# Altium PCB PCB1.PcbDoc (part 1 of 7)
Units mil, origin at the board's own origin, x right, y up, seen from the top; angles counter-clockwise.
Board outline 7650 x 4400 mil, 2 copper layers (Top Layer, Bottom Layer); 123 components, 190 nets, 788 pads, 165 vias.
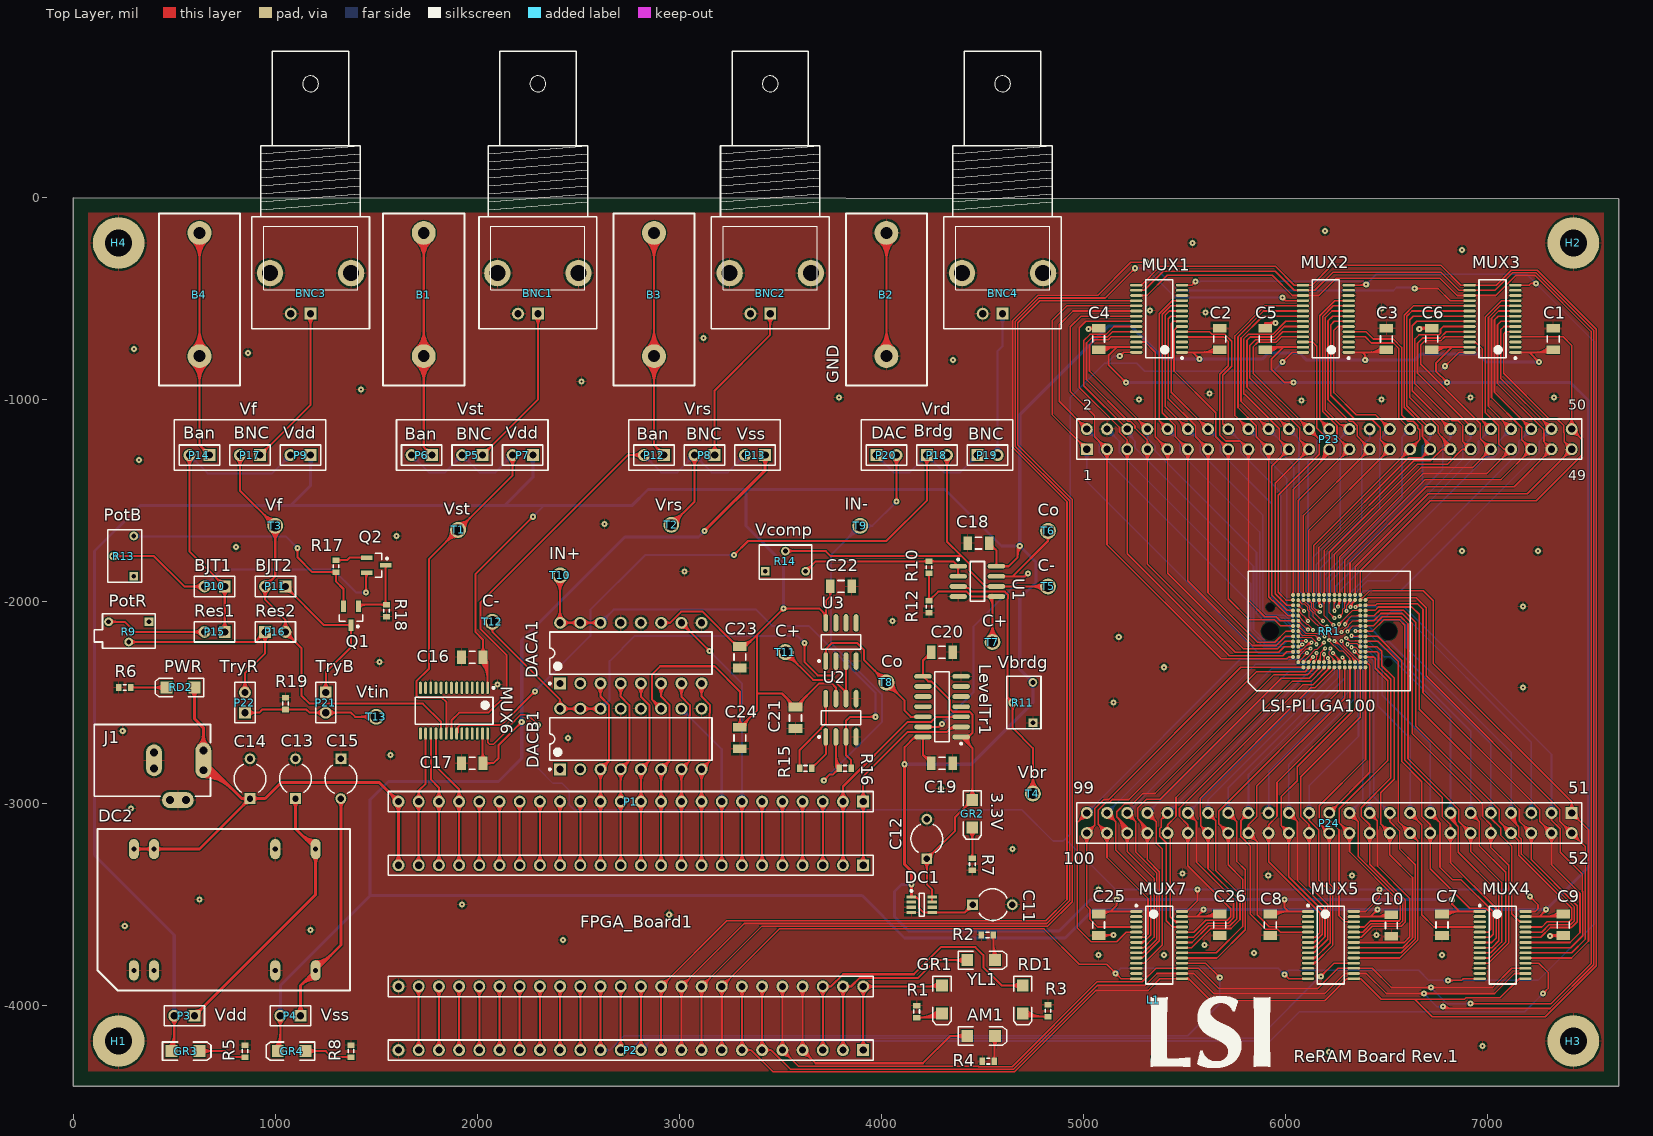
[diagram p0: Top Layer view]
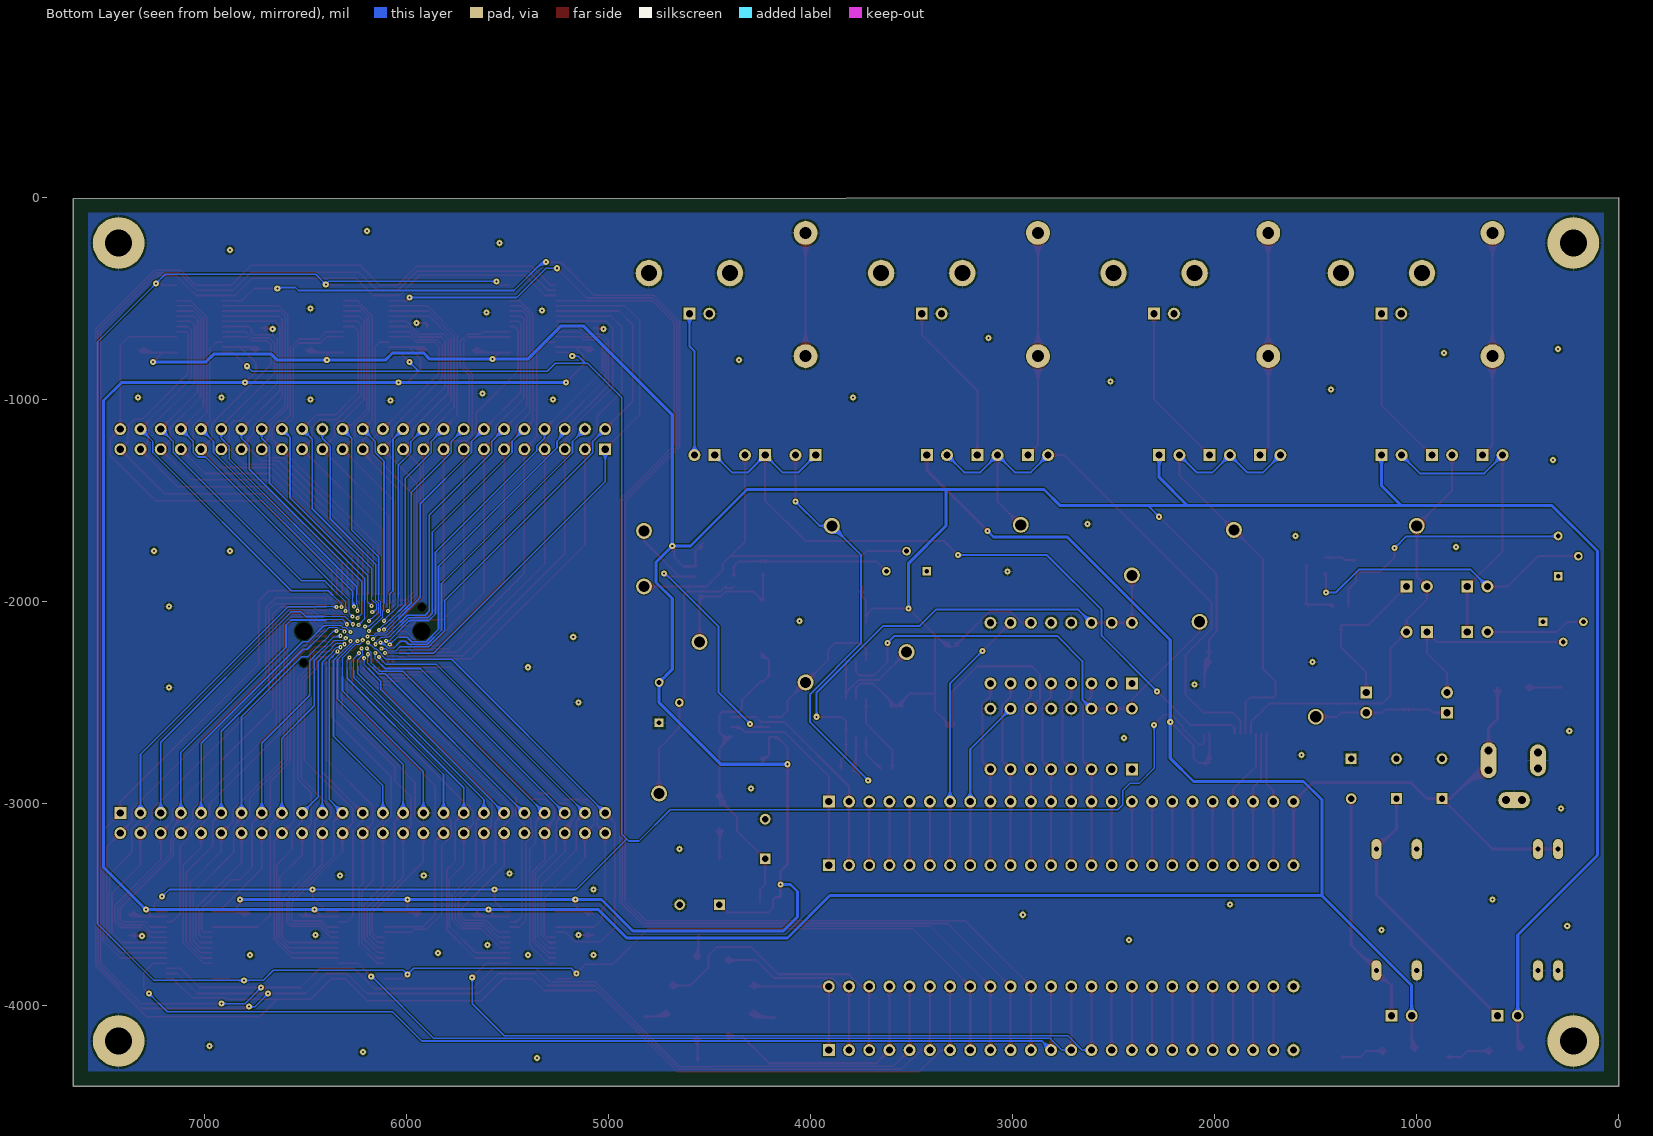
[diagram p1: Bottom Layer view, seen from below]

## Layer stack, top to bottom
Top Solder: solder mask 0.4, Solder Resist, Dk 3.5
Top Layer: signal copper 1.4
Dielectric 1: dielectric 12.6, FR-4, Dk 4.8
Bottom Layer: signal copper 1.4
Bottom Solder: solder mask 0.4, Solder Resist, Dk 3.5

## Board outline
0,0 0,-4400 7650,-4400 7650,-5

## Design rules (kind name [scope] priority, off if disabled: settings)
Clearance Clearance-xPP-xTP-xTT [All] p1: gap=5
ComponentClearance [All] p1: gap=9.84 collisioncheckmode=3 verticalgap=9.84 showdistances=FALSE
DiffPairsRouting [All] p1: maxlimit=9.84 minlimit=9.84 mostfreqgap=9.84 toplayer_minwidth=15 toplayer_maxwidth=15 toplayer_prefwidth=15 bottomlayer_minwidth=15 bottomlayer_maxwidth=15 bottomlayer_prefwidth=15 maxuncoupledlength=492.13
Height [All] p1: minheight=0 maxheight=984.25 prefheight=492.13
HoleSize HoleSize-PTH [All] p1: absolutevalues=TRUE maxlimit=200 minlimit=6 maxpercent=80.000 minpercent=20.000
HoleToHoleClearance [All] p1: gap=5.91 allowstackedmicrovias=TRUE
MinimumAnnularRing "Minimum IAR  >0.45mm" [((ObjectKind = 'Pad') OR (ObjectKind = 'Via')) And (Layer = 'MultiLayer') And (HoleDiameter > AsMM(0.45))] p1: minimumring=7 // minimum inner annular ring for pads > 0.45mm finished hole size
MinimumAnnularRing "Minimum IAR <=0.45mm" [((ObjectKind = 'Pad') OR (ObjectKind = 'Via')) And (Layer = 'MultiLayer') And (HoleDiameter <= AsMM(0.45))] p2: minimumring=7 // minimum inner annular ring for pads <= 0.45mm finished hole size
MinimumSolderMaskSliver [All] p1 off: minsoldermaskwidth=3.94
PlaneClearance PlaneClearance-IPI [All] p1: clearance=15.75
PlaneConnect [All] p1: planeconnectstyle=Relief reliefexpansion=15.75 reliefentries=4 reliefconductorwidth=7.87 reliefairgap=7.87
PolygonConnect PolygonConnect-xTW [All] p1: connectstyle=Relief reliefconductorwidth=7.87 reliefentries=4 polygonreliefangle="90 Angle" airgapwidth=10
RoutingCorners [All] p1: cornerstyle=45-Degree minsetback=98.43 maxsetback=98.43
RoutingVias "RoutingVias > 0.45mm" [(ObjectKind = 'Via') And (HoleDiameter > AsMM(0.45))] p1: holewidth=19.68 width=39.37 viastyle="Through Hole" minholewidth=17.72 minwidth=37.4 maxholewidth=35.43 maxwidth=55.12 // finishet hole size > 0.45mm
RoutingVias "RoutingVias <= 0.45mm" [(ObjectKind = 'Via') And (HoleDiameter <= AsMM(0.45))] p2: holewidth=6 width=20 viastyle="Through Hole" minholewidth=6 minwidth=20 maxholewidth=6 maxwidth=20 // finishet hole size <= 0.45mm
SilkToBoardRegionClearance [All] p1 off:
SilkToSilkClearance [All] p1: silktosilkclearance=7.87
SilkToSolderMaskClearance SilkscreenOverComponentPads [IsPad] p1 off: minsilkscreentomaskgap=7.87 clearancetoexposedcopper=TRUE
SolderMaskExpansion [All] p1: expansion=3.94
Width Width-xTW [All] p1: maxlimit=15 minlimit=5 preferedwidth=8 minimp=50.000000 maximp=50.000000 favimp=50.000000
17 further rules are at their usual default settings.

## Classes and differential pairs
net class S[0..5]: S0 S1 S2 S3 S4 S5
net class MODERW[0..1]: MODERW0 MODERW1
net class DAC[0..5]: DAC0 DAC1 DAC2 DAC3 DAC4 DAC5
net class CELL[0..95]: CELL0 CELL1 CELL2 CELL3 CELL4 CELL5 CELL6 CELL7 CELL8 CELL9 CELL10 CELL11 CELL12 CELL13 CELL14 CELL15 CELL16 CELL17 CELL18 CELL19 CELL20 CELL21 CELL22 CELL23 CELL24 CELL25 CELL26 CELL27 CELL28 CELL29 CELL30 CELL31 CELL32 CELL33 CELL34 CELL35 CELL36 CELL37 CELL38 CELL39 CELL40 CELL41 CELL42 CELL43 CELL44 CELL45 CELL46 CELL47 CELL48 CELL49 CELL50 CELL51 CELL52 CELL53 CELL54 CELL55 CELL56 CELL57 CELL58 CELL59 CELL60 CELL61 CELL62 CELL63 CELL64 CELL65 CELL66 CELL67 CELL68 CELL69 CELL70 CELL71 CELL72 CELL73 CELL74 CELL75 CELL76 CELL77 CELL78 CELL79 CELL80 CELL81 CELL82 CELL83 CELL84 CELL85 CELL86 CELL87 CELL88 CELL89 CELL90 CELL91 CELL92 CELL93 CELL94 CELL95
net class A[0..3]: A0 A1 A2 A3
component class RWcircuit_2: BNC4 C18 C19 C20 C21 C22 C23 C24 DACA1 DACB1 H1 H2 H3 H4 LevelTr1 P18 P19 P20 R10 R11 R12 R14 R15 R16 T4 T5 T6 T7 T8 T9 T10 T11 T12 U1 U2 U3
component class RWcircuit_1: B1 B2 B3 B4 BNC1 BNC2 BNC3 C16 C17 L1 MUX6 P5 P6 P7 P8 P9 P10 P11 P12 P13 P14 P15 P16 P17 P21 P22 Q1 Q2 R9 R13 R17 R18 R19 T1 T2 T3 T13
component class FPGA_board_and_power: AM1 C11 C12 C13 C14 C15 DC1 DC2 FPGA_Board1 GR1 GR2 GR3 GR4 J1 P1 P2 P3 P4 R1 R2 R3 R4 R5 R6 R7 R8 RD1 RD2 YL1
component class AddressingMuxes_2: C7 C8 C9 C10 C25 C26 MUX4 MUX5 MUX7
component class AddressingMuxes_1: C1 C2 C3 C4 C5 C6 MUX1 MUX2 MUX3
component class MemoryChip: P23 P24 RR1

## Components (designator, comment, footprint, x,y, rotation, side; value= is the part's Value field where it differs from the comment)
AM1 "LED2" 3.2X1.6X1.1 4493.9,-4150 r0 top
B1 "Banana_conn" Banana_conn_4mm 1735,-175 r0 top
B2 "Banana_conn" Banana_conn_4mm 4025,-175 r0 top
B3 "Banana_conn" Banana_conn_4mm 2875,-175 r0 top
B4 "Banana_conn" Banana_conn_4mm 625,-175 r0 top
BNC1 "BNC" "BNC_RA CON" 2300,-575 r270 top
BNC2 "BNC" "BNC_RA CON" 3450,-575 r270 top
BNC3 "BNC" "BNC_RA CON" 1175,-575 r270 top
BNC4 "BNC" "BNC_RA CON" 4600,-575 r270 top
C1 "Cap Semi" C1206 7325,-700 r270 top
C2 "Cap Semi" C1206 5675,-700 r90 top
C3 "Cap Semi" C1206 6500,-700 r90 top
C4 "Cap Semi" C1206 5075,-700 r90 top
C5 "Cap Semi" C1206 5900,-700 r90 top
C6 "Cap Semi" C1206 6725,-700 r270 top
C7 "Cap Semi" C1206 6775,-3600 r270 top
C8 "Cap Semi" C1206 5925,-3600 r90 top
C9 "Cap Semi" C1206 7375,-3600 r90 top
C10 "Cap Semi" C1206 6525,-3603.15 r90 top
C11 "Cap2" CAPR5-4X5 4550,-3500 r0 top
C12 "Cap2" CAPR5-4X5 4225,-3175 r90 top
C13 "Cap2" CAPR5-4X5 1100,-2876.57 r90 top
C14 "Cap2" CAPR5-4X5 875,-2876.57 r90 top
C15 "Cap2" CAPR5-4X5 1325,-2876.57 r270 top
C16 "Cap Semi" C1206 1975,-2275 r180 top
C17 "Cap Semi" C1206 1975,-2800 r0 top
C18 "Cap Semi" C1206 4480.43,-1710 r0 top
C19 "Cap Semi" C1206 4300,-2800 r180 top
C20 "Cap Semi" C1206 4300,-2250 r180 top
C21 "Cap Semi" C1206 3575,-2575 r270 top
C22 "Cap Semi" C1206 3800,-1925 r180 top
C23 "Cap Semi" C1206 3300,-2275 r270 top
C24 "Cap Semi" C1206 3300,-2675 r90 top
C25 "Cap Semi" C1206 5075,-3600 r90 top
C26 "Cap Semi" C1206 5675,-3600 r90 top
DACA1 "AD558JNZ" N-16 2760,-2255 r90 top
DACB1 "AD558JNZ" N-16 2760,-2680 r90 top
DC1 "LT3007ETS8-3.3#TRMPBF" LT-TS8-8-TSOT-23_V 4200,-3500 r0 top
DC2 "TEN_3-1221" TEN_3-1221 750,-3525 r90 top
FPGA_Board1 "Cmod_S6" Cmod_S6_double_conn 2760,-3605 r270 top
GR1 "LED2" 3.2X1.6X1.1 4300,-3968.9 r270 top
GR2 "" 3.2X1.6X1.1 4450,-3050 r270 top
GR3 "" 3.2X1.6X1.1 556.1,-4225 r0 top
GR4 "" 3.2X1.6X1.1 1081.1,-4225 r180 top
H1 "M3_hole" M3_hole 225,-4175 r0 top
H2 "M3_hole" M3_hole 7425,-225 r0 top
H3 "M3_hole" M3_hole 7425,-4175 r0 top
H4 "M3_hole" M3_hole 225,-225 r0 top
J1 "PWR2.5" KLD-0202 104.72,-2785.63 r0 top
L1 "LSI_logo" LSI_logo 5345,-3970 r0 top
LevelTr1 "TXS0104E" SOIC127P600X175-14N 4300.51,-2520 r180 top
MUX1 "ADG1606" TSOP65P640X120-28N 5375,-600 r180 top
MUX2 "ADG1606" TSOP65P640X120-28N 6200,-600 r180 top
MUX3 "ADG1606" TSOP65P640X120-28N 7025,-600 r180 top
MUX4 "ADG1606" TSOP65P640X120-28N 7075,-3700 r0 top
MUX5 "ADG1606" TSOP65P640X120-28N 6225,-3700 r0 top
MUX6 "ADG1606" TSOP65P640X120-28N 1885,-2540 r270 top
MUX7 "ADG1606" TSOP65P640X120-28N 5375,-3700 r0 top
P1 "Header 24" HDR1X24 3910,-2990 r180 top
P2 "Header 24" HDR1X24 3910,-4220 r180 top
P3 "Header 2" HDR1X2 600,-4050 r180 top
P4 "Header 2" HDR1X2 1125,-4050 r180 top
P5 "Header 2" HDR1X2 2025,-1275 r180 top
P6 "Header 2" HDR1X2 1775,-1275 r180 top
P7 "Header 2" HDR1X2 2275,-1275 r180 top
P8 "Header 2" HDR1X2 3175,-1275 r180 top
P9 "Header 2" HDR1X2 1175,-1275 r180 top
P10 "Header 2" HDR1X2 750,-1925 r180 top
P11 "Header 2" HDR1X2 1050,-1925 r180 top
P12 "Header 2" HDR1X2 2925,-1275 r180 top
P13 "Header 2" HDR1X2 3425,-1275 r180 top
P14 "Header 2" HDR1X2 675,-1275 r180 top
P15 "Header 2" HDR1X2 750,-2150 r180 top
P16 "Header 2" HDR1X2 950,-2150 r0 top
P17 "Header 2" HDR1X2 925,-1275 r180 top
P18 "Header 2" HDR1X2 4225,-1275 r0 top
P19 "Header 2" HDR1X2 4475,-1275 r0 top
P20 "Header 2" HDR1X2 3975,-1275 r0 top
P21 "Header 2" HDR1X2 1250,-2450 r270 top
P22 "Header 2" HDR1X2 850,-2550 r90 top
P23 "Header 25X2" HDR2X25 5017,-1246 r0 top
P24 "Header 25X2" HDR2X25 7417,-3046 r180 top
Q1 "BSS84_MOSFET-P" BSS84_MOSFET-P 1375,-2070 r270 top
Q2 "PNP" MMBT5087_PNP 1500,-1820 r0 top
R1 "Res3" J1-0603 4175,-4029.53 r270 top
R2 "Res3" J1-0603 4525,-3650 r0 top
R3 "Res3" J1-0603 4825,-4025 r270 top
R4 "Res3" J1-0603 4529.53,-4275 r0 top
R5 "Res3" J1-0603 850,-4225 r90 top
R6 "Res3" J1-0603 254.53,-2425 r180 top
R7 "Res3" J1-0603 4450,-3300 r270 top
R8 "Res3" J1-0603 1375,-4225 r90 top
R9 "Trim" Trim_Bourns_3266X 275,-2100 r180 top
R10 "Res3" J1-0603 4235,-1830 r90 top
R11 "Trim" Trim_Bourns_3266W 4750,-2500 r90 top
R12 "Res3" J1-0603 4235,-2025.47 r90 top
R13 "Trim" Trim_Bourns_3266W 300,-1775 r90 top
R14 "Trim" Trim_Bourns_3266W 3525,-1850 r0 top
R15 "Res3" J1-0603 3625,-2825 r180 top
R16 "Res3" J1-0603 3820.47,-2825 r180 top
R17 "Res3" J1-0603 1300,-1824.53 r90 top
R18 "Res3" J1-0603 1550,-2045 r270 top
R19 "Res3" J1-0603 1050,-2504.53 r270 top
RD1 "LED2" 3.2X1.6X1.1 4700,-3968.9 r270 top
RD2 "" 3.2X1.6X1.1 531.1,-2425 r180 top
RR1 "ReRAM chip" LSI-PLLGA100 6217,-2146 r90 top
T1 "Test_point" Test_point_1.32mm 1905,-1645 r180 top
T2 "Test_point" Test_point_1.32mm 2960,-1620 r180 top
T3 "Test_point" Test_point_1.32mm 1000,-1625 r180 top
T4 "Test_point" Test_point_1.32mm 4750,-2950 r180 top
T5 "Test_point" Test_point_1.32mm 4825,-1925 r180 top
T6 "Test_point" Test_point_1.32mm 4825,-1650 r180 top
T7 "Test_point" Test_point_1.32mm 4550,-2200 r180 top
T8 "Test_point" Test_point_1.32mm 4025,-2400 r180 top
T9 "Test_point" Test_point_1.32mm 3895,-1625 r180 top
T10 "Test_point" Test_point_1.32mm 2410,-1870 r180 top
T11 "Test_point" Test_point_1.32mm 3525,-2250 r180 top
T12 "Test_point" Test_point_1.32mm 2075,-2100 r180 top
T13 "Test_point" Test_point_1.32mm 1500,-2570 r0 top
U1 "AD8616ARZ" ADI-R-8_N 4475,-1900 r0 top
U2 "LT1167AIS8#PBF" LT-S8-8_N 3800,-2575 r90 top
U3 "AD8616ARZ" ADI-R-8_N 3800,-2200 r90 top
YL1 "LED2" 3.2X1.6X1.1 4493.9,-3775 r0 top

## Footprints (in the part's own frame and the unit in brackets; to place one, negate y for a bottom-side part, rotate by r counter-clockwise, add the part's x,y. Pads: shape width x height; smd on the part's side, far side on the other; paste and mask are expansions set on the pad)
3.2X1.6X1.1 [mm] "SMT LED; 2 Flat Leads"
  rect 1.5x1.5 smd: 1(-1.75,0) 2(1.75,0)
  silkscreen extent -2.9,-1.15 3.2,1.15
ADI-R-8_N [mm] "SOIC, 8-Leads, Body 4.9x3.9mm, Pitch 1.27mm, IPC Medium Density"
  oval 2.2x0.6 smd: 1(-2.4,1.905) 2(-2.4,0.635) 3(-2.4,-0.635) 4(-2.4,-1.905) 5(2.4,-1.905) 6(2.4,-0.635) 7(2.4,0.635) 8(2.4,1.905)
  silkscreen extent -2.52,-2.5 0.9,2.88, body extent -2,-2.5 2,2.5, height 1.75
Banana_conn_4mm [mm]
  round 3 hole 1.5: 1(0,-15.5) 1(0,0)
  silkscreen extent -5.1,-19.18 5.1,2.41
"BNC_RA CON" [mm] "Connector; BNC Elbow"
  rect 1.5x1.5 hole 0.9: 1(0,0)
  round 3.3 hole 2: 2(-5.1,5.1) 2(-5.1,-5.1)
  round 1.5 hole 0.9: 2(0,-2.5)
  silkscreen extent -33,-7.4 1.9,7.4
BSS84_MOSFET-P [mm]
  rect 1.45x0.6 smd: 1(-1.175,0.95) 2(-1.175,-0.95) 3(1.175,0)
  silkscreen extent -0.1,-1.5 1.47,1.5, body extent -0.7,-1.5 0.7,1.5, height 1.1
C1206 [mm] "Chip Capacitor, Body 3.2x1.6mm, IPC High Density"
  rect 1.1x1.7 smd: 1(-1.35,0) 2(1.35,0)
  silkscreen extent -0.4,-0.75 0.4,0.75, body extent -1.7,-0.9 1.7,0.9, height 1.3
CAPR5-4X5 [mm] "Capacitor; 2 Leads"
  rect 1.35x1.35 hole 0.8: 1(-2.5,0)
  round 1.35 hole 0.8: 2(2.5,0)
  silkscreen extent -1.69,-2 1.82,2
Cmod_S6_double_conn [mm]
  rect 1.5x1.5 hole 0.9: 1(-7.62,29.21)
  round 1.5 hole 0.9: 2(-7.62,26.67) 3(-7.62,24.13) 4(-7.62,21.59) 5(-7.62,19.05) 6(-7.62,16.51) 7(-7.62,13.97) 8(-7.62,11.43) 9(-7.62,8.89) 10(-7.62,6.35) 11(-7.62,3.81) 12(-7.62,1.27) 13(-7.62,-1.27) 14(-7.62,-3.81) 15(-7.62,-6.35) 16(-7.62,-8.89) 17(-7.62,-11.43) 18(-7.62,-13.97) 19(-7.62,-16.51) 20(-7.62,-19.05) 21(-7.62,-21.59) 22(-7.62,-24.13) 23(-7.62,-26.67) 24(-7.62,-29.21) 25(7.62,-29.21) 26(7.62,-26.67) 27(7.62,-24.13) 28(7.62,-21.59) 29(7.62,-19.05) 30(7.62,-16.51) 31(7.62,-13.97) 32(7.62,-11.43) 33(7.62,-8.89) 34(7.62,-6.35) 35(7.62,-3.81) 36(7.62,-1.27) 37(7.62,1.27) 38(7.62,3.81) 39(7.62,6.35) 40(7.62,8.89) 41(7.62,11.43) 42(7.62,13.97) 43(7.62,16.51) 44(7.62,19.05) 45(7.62,21.59) 46(7.62,24.13) 47(7.62,26.67) 48(7.62,29.21)
  silkscreen extent -8.89,-30.48 8.89,30.48
HDR1X2 [mm] "Connector; Header; 2 Position"
  rect 1.5x1.5 hole 0.9: 1(0,0)
  round 1.5 hole 0.9: 2(2.54,0)
  silkscreen extent -1.27,-1.27 3.81,1.27
HDR1X24 [mm] "Connector; Header; 24 Position"
  rect 1.5x1.5 hole 0.9: 1(0,0)
  round 1.5 hole 0.9: 2(2.54,0) 3(5.08,0) 4(7.62,0) 5(10.16,0) 6(12.7,0) 7(15.24,0) 8(17.78,0) 9(20.32,0) 10(22.86,0) 11(25.4,0) 12(27.94,0) 13(30.48,0) 14(33.02,0) 15(35.56,0) 16(38.1,0) 17(40.64,0) 18(43.18,0) 19(45.72,0) 20(48.26,0) 21(50.8,0) 22(53.34,0) 23(55.88,0) 24(58.42,0)
  silkscreen extent -1.27,-1.27 59.69,1.27
HDR2X25 [mm] "Connector; Header; 25x2 Position"
  rect 1.5x1.5 hole 0.9: 1(0,0)
  round 1.5 hole 0.9: 2(0,2.54) 3(2.54,0) 4(2.54,2.54) 5(5.08,0) 6(5.08,2.54) 7(7.62,0) 8(7.62,2.54) 9(10.16,0) 10(10.16,2.54) 11(12.7,0) 12(12.7,2.54) 13(15.24,0) 14(15.24,2.54) 15(17.78,0) 16(17.78,2.54) 17(20.32,0) 18(20.32,2.54) 19(22.86,0) 20(22.86,2.54) 21(25.4,0) 22(25.4,2.54) 23(27.94,0) 24(27.94,2.54) 25(30.48,0) 26(30.48,2.54) 27(33.02,0) 28(33.02,2.54) 29(35.56,0) 30(35.56,2.54) 31(38.1,0) 32(38.1,2.54) 33(40.64,0) 34(40.64,2.54) 35(43.18,0) 36(43.18,2.54) 37(45.72,0) 38(45.72,2.54) 39(48.26,0) 40(48.26,2.54) 41(50.8,0) 42(50.8,2.54) 43(53.34,0) 44(53.34,2.54) 45(55.88,0) 46(55.88,2.54) 47(58.42,0) 48(58.42,2.54) 49(60.96,0) 50(60.96,2.54)
  silkscreen extent -1.27,-1.27 62.23,3.81
J1-0603 [mm] "Chip Resistor, Body 1.6x0.8mm, IPC High Density"
  rect 0.7x0.9 smd: 1(-0.75,0) 2(0.75,0)
  silkscreen extent -0.2,-0.35 0.2,0.35, body extent -0.85,-0.48 0.85,0.48, height 0.9
KLD-0202 [mm] "DC Power Jack, 2.5mm, KLD Series, PCB Mount"
  oval 2x4.5 all layers, no hole: 1(13.7,0)
  round 1.5 hole 1: 1A(13.7,-1.25) 1B(13.7,1.25) 2A(7.5,-1) 2B(7.5,1) 3A(9.5,-5) 3B(11.5,-5)
  oval 2x4 all layers, no hole: 2(7.5,0)
  oval 4x2 all layers, no hole: 3(10.5,-5)
  silkscreen extent 0,-4.5 14.6,4.5
LSI-PLLGA100 [mm]
  round 0.5 smd: 1(-3.9,3.9) 2(-3.25,3.9) 3(-3.25,4.55) 4(-2.6,3.9) 5(-2.6,4.55) 6(-1.95,3.9) 7(-1.95,4.55) 8(-1.3,3.9) 9(-1.3,4.55) 10(-0.65,3.9) 11(-0.65,4.55) 12(0,3.9) 13(0,4.55) 14(0.65,3.9) 15(0.65,4.55) 16(1.3,3.9) 17(1.3,4.55) 18(1.95,3.9) 19(1.95,4.55) 20(2.6,3.9) 21(2.6,4.55) 22(3.25,3.9) 23(3.25,4.55) 24(3.9,4.55) 25(4.55,4.55) 26(3.9,3.9) 27(4.55,3.9) 28(3.9,3.25) 29(4.55,3.25) 30(3.9,2.6) 31(4.55,2.6) 32(3.9,1.95) 33(4.55,1.95) 34(3.9,1.3) 35(4.55,1.3) 36(3.9,0.65) 37(4.55,0.65) 38(3.9,0) 39(4.55,0) 40(3.9,-0.65) 41(4.55,-0.65) 42(3.9,-1.3) 43(4.55,-1.3) 44(3.9,-1.95) 45(4.55,-1.95) 46(3.9,-2.6) 47(4.55,-2.6) 48(3.9,-3.25) 49(4.55,-3.25) 50(4.55,-3.9) 51(3.9,-3.9) 52(3.9,-4.55) 53(3.25,-3.9) 54(3.25,-4.55) 55(2.6,-3.9) 56(2.6,-4.55) 57(1.95,-3.9) 58(1.95,-4.55) 59(1.3,-3.9) 60(1.3,-4.55) 61(0.65,-3.9) 62(0.65,-4.55) 63(0,-3.9) 64(0,-4.55) 65(-0.65,-3.9) 66(-0.65,-4.55) 67(-1.3,-3.9) 68(-1.3,-4.55) 69(-1.95,-3.9) 70(-1.95,-4.55) 71(-2.6,-3.9) 72(-2.6,-4.55) 73(-3.25,-3.9) 74(-3.25,-4.55) 75(-3.9,-4.55) 76(-4.55,-4.55) 77(-3.9,-3.9) 78(-4.55,-3.9) 79(-3.9,-3.25) 80(-4.55,-3.25) 81(-3.9,-2.6) 82(-4.55,-2.6) 83(-3.9,-1.95) 84(-4.55,-1.95) 85(-3.9,-1.3) 86(-4.55,-1.3) 87(-3.9,-0.65) 88(-4.55,-0.65) 89(-3.9,0) 90(-4.55,0) 91(-3.9,0.65) 92(-4.55,0.65) 93(-3.9,1.3) 94(-4.55,1.3) 95(-3.9,1.95) 96(-4.55,1.95) 97(-3.9,2.6) 98(-4.55,2.6) 99(-3.9,3.25) 100(-4.55,3.25)
  round 0 hole 1.05 unplated paste+0 mask+0: ""(-4,-7.425) ""(3,7.425)
  round 0 hole 2.2 unplated paste+0 mask+0: ""(0,7.425) ""(0,-7.425)
  silkscreen extent -7.5,-10.16 7.5,10.16
LSI_logo [mil]
  silkscreen extent -12,-336 581,17
LT-S8-8_N [mm] "SOIC, 8-Leads, Body 4.9x3.9mm, Pitch 1.27mm, IPC Medium Density"
  oval 2.2x0.6 smd: 1(-2.4,1.905) 2(-2.4,0.635) 3(-2.4,-0.635) 4(-2.4,-1.905) 5(2.4,-1.905) 6(2.4,-0.635) 7(2.4,0.635) 8(2.4,1.905)
  silkscreen extent -2.52,-2.5 0.9,2.88, body extent -2,-2.5 2,2.5, height 1.76
LT-TS8-8-TSOT-23_V [mm] "SOT23, 8-Leads, Body 2.90x1.63mm, Pitch 0.65mm, Recommended"
  rect 1.22x0.4 smd: 1(-1.31,0.975) 2(-1.31,0.325) 3(-1.31,-0.325) 4(-1.31,-0.975) 5(1.31,-0.975) 6(1.31,-0.325) 7(1.31,0.325) 8(1.31,0.975)
  silkscreen extent -1.43,-1.45 0.3,1.85, body extent -0.87,-1.45 0.88,1.45, height 1
M3_hole [mm]
  round 6.5 hole 3.4 mask+0.5: 1(0,0)
MMBT5087_PNP [mm]
  rect 1.45x0.6 smd: 1(1.175,0) 2(-1.175,0.95) 3(-1.175,-0.95)
  silkscreen extent -0.1,-1.5 1.48,1.5, body extent -0.7,-1.5 0.7,1.5, height 1.1
N-16 [mm] "DIP, 16-Leads, Row Spacing 7.62mm, Pitch 2.54mm, Body 20.1x6.6mm"
  rect 1.5x1.5 hole 0.9: 1(-3.81,8.89)
  round 1.5 hole 0.9: 2(-3.81,6.35) 3(-3.81,3.81) 4(-3.81,1.27) 5(-3.81,-1.27) 6(-3.81,-3.81) 7(-3.81,-6.35) 8(-3.81,-8.89) 9(3.81,-8.89) 10(3.81,-6.35) 11(3.81,-3.81) 12(3.81,-1.27) 13(3.81,1.27) 14(3.81,3.81) 15(3.81,6.35) 16(3.81,8.89)
  silkscreen extent -3.93,-10.2 2.65,10.31, body extent -3.55,-10.15 3.55,10.15, height 5.33
SOIC127P600X175-14N [mm] "SOIC, 14-Leads, Body 8.65x3.90mm, Pitch 1.27mm, IPC Medium Density"
  oval 2.2x0.6 smd: 1(-2.4,3.81) 2(-2.4,2.54) 3(-2.4,1.27) 4(-2.4,0) 5(-2.4,-1.27) 6(-2.4,-2.54) 7(-2.4,-3.81) 8(2.4,-3.81) 9(2.4,-2.54) 10(2.4,-1.27) 11(2.4,0) 12(2.4,1.27) 13(2.4,2.54) 14(2.4,3.81)
  silkscreen extent -2.53,-4.4 0.9,4.78, body extent -2,-4.4 2,4.4, height 1.75
TEN_3-1221 [mil]
  oval 100x50 hole 25: 2(-300,450) 3(-300,350) 9(-300,-250) 11(-300,-450) 14(300,-450) 16(300,-250) 22(300,350) 23(300,450)
  silkscreen extent -400,-620 400,630
Test_point_1.32mm [mm]
  round 2 hole 1.4: 1(0,0)
Trim_Bourns_3266W [mm]
  rect 1.1x1.1 hole 0.6: 1(-2.54,0)
  round 1.1 hole 0.6: 2(0,2.54) 3(2.54,0)
  silkscreen extent -3.3,-1.02 3.3,3.3
Trim_Bourns_3266X [mm]
  rect 1.1x1.1 hole 0.6: 1(-2.54,0)
  round 1.1 hole 0.6: 2(0,2.54) 3(2.54,0)
  silkscreen extent -3.3,-1.02 4.32,3.3
TSOP65P640X120-28N [mm] "TSOP, 28-Leads, Body 9.70x4.40mm, Pitch 0.65mm, IPC Medium Density"
  oval 1.55x0.35 smd: 1(-2.875,4.225) 2(-2.875,3.575) 3(-2.875,2.925) 4(-2.875,2.275) 5(-2.875,1.625) 6(-2.875,0.975) 7(-2.875,0.325) 8(-2.875,-0.325) 9(-2.875,-0.975) 10(-2.875,-1.625) 11(-2.875,-2.275) 12(-2.875,-2.925) 13(-2.875,-3.575) 14(-2.875,-4.225) 15(2.875,-4.225) 16(2.875,-3.575) 17(2.875,-2.925) 18(2.875,-2.275) 19(2.875,-1.625) 20(2.875,-0.975) 21(2.875,-0.325) 22(2.875,0.325) 23(2.875,0.975) 24(2.875,1.625) 25(2.875,2.275) 26(2.875,2.925) 27(2.875,3.575) 28(2.875,4.225)
  silkscreen extent -3,-4.9 1.7,5.07, body extent -2.25,-4.9 2.25,4.9, height 1.2

## Part data
AM1 GR1 RD1 YL1: "Typical RED, GREEN, YELLOW, AMBER GaAs LED"
B1 B2 B3 B4: library part Banana_conn_4mm, "Multicomp banana connector 4mm pcb through hole"
BNC1 BNC2 BNC3 BNC4: "BNC Elbow Connector"
C1 C2 C3 C4 C5 C6 C7 C8 C9 C10 C16 C17 C18 C19 C20 C21 C22 C23 C24 C25 C26: "Capacitor (Semiconductor SIM Model)"
C11 C12 C13 C14 C15: "Capacitor"
DACA1 DACB1: "Single 8-Bit Low Cost Complete uP-Compatible DACPORT, 0 to +70 degC, N-16, Pb-Free, Tube"
DC1: "3 uA IQ, 20 mA, Low Dropout Fault Tolerant Linear Regulator, 2 to 45 V Vin, 3.3 V Vout, 8-pin SOT23 (TS8-8), -40 to 125 degC, Pb-Free, Mini Tape and Reel"
DC2: "Tracopower TEN 3-1221"
FPGA_Board1: "Digilent Cmod S6 Board"
GR2 GR3 GR4 RD2: library part LED2, "Typical RED, GREEN, YELLOW, AMBER GaAs LED"
H1 H2 H3 H4: "M3 hole"
J1: "Low Voltage Power Supply Connector"
L1: "LSI logo"
LevelTr1: "Texas Instruments TXS0104E"
MUX1 MUX2 MUX3 MUX4 MUX5 MUX6 MUX7: "Analog Devices ADG1606"
P1 P2: "Header, 24-Pin"
P3 P4 P5 P6 P7 P8 P9 P10 P11 P12 P13 P14 P15 P16 P17 P18 P19 P20 P21 P22: "Header, 2-Pin"
P23 P24: "Header, 25-Pin, Dual row"
Q1: "BSS84 P-Channel MOSFET"
Q2: library part MMBT5087_PNP, "MMBT5087 PNP Bipolar Transistor"
R1 R2 R3 R4 R5 R6 R7 R8 R10 R12 R15 R16 R17 R18 R19: "Resistor"
R9: library part Trim_Bourns_3266X, "Trimmer Bourns 3266X"
R11 R13 R14: library part Trim_Bourns_3266W, "Trimmer Bourns 3266W"
RR1: library part ReRAM_LSI-PLLGA100, "ReRAM chip on LSI-PLLGA100 custom socket"
T1 T2 T3 T4 T5 T6 T7 T8 T9 T10 T11 T12 T13: library part Test_point_1.32mm, "Test point 1.32mm"
U1 U3: "Double Channel Wide Bandwidth Operational Amplifier, 24 MHz BW, 12 V/us SR, Industrial, 8-pin SOIC (R-8), Tube"
U2: "Single Channel, Precision Operational Amplifier, Low Bias Current IA, 1 MHz Typical GBW, 1.2 V/us Typical SR, 4.6 to 40 V, 8-Pin SOIC (S8-8), Industrial, Pb-Free"

## Via types
v1: diameter 30, hole 10, Top Layer to Bottom Layer, 118 vias
v2: diameter 20, hole 6, Top Layer to Bottom Layer, 47 vias

## Nets (pads, with @x,y where several pads share a name; then routed paths per layer and width w, separated by ;. In a path a pad name is that pad's centre, name@x,y a point inside that pad or via, vN(x,y) a via of type N, cw(c..) or ccw(c..) an arc to the next point about the centre after c; other vN are vias at no path point)
3.3V: C12.1 C20.2 DC1.7 DC1.8 GR2.1 LevelTr1.1 LevelTr1.8 | length 2448.4
  Top Layer w10: 4206.03,-2290.83 cw(c4237.57,-2322.37) C20.2@4244.33,-2278.27 ; C12.1@4209.74,-3288.68 cw(c4172.91,-3325.51) 4225,-3325.51 cw(c4277.09,-3325.51) C12.1@4240.26,-3288.68 ; C12.1@4216.82,-3281.61 cw(c4197.06,-3301.37) 4225,-3301.37 cw(c4252.94,-3301.37) C12.1@4233.18,-3281.61 ; 4219.99,-2276.86 cw(c4241.28,-2298.15) C20.2@4245.84,-2268.39 ; C12.1@4225,-3261.85 ccw(c4225,-3233.91) 4244.76,-3253.67 ccw(c4264.52,-3273.43) C12.1@4236.57,-3273.43 ; C12.1@4225,-3251.85 ccw(c4225,-3199.76) 4261.83,-3236.59 ccw(c4298.66,-3273.43) C12.1@4246.57,-3273.43 ; C20.2@4226.77,-2270.08 ccw(c4218.51,-2261.81) C20.2@4230.2,-2261.81 ; C20.2@4246.85,-2250 4206.02,-2290.83 LevelTr1.8@4206.02,-2370 4231.21,-2395.19 4247.8,-2395.19 4338.69,-2486.09 4338.69,-2530.28 4353.6,-2545.19 4436.77,-2545.19 4451.31,-2559.72 4451.31,-2648.69 4430,-2670 LevelTr1.1@4395,-2670 4450,-2725 ; DC1.7@4251.57,-3487.2 DC1.8@4251.57,-3461.61 4251.57,-3426.57 4225,-3400 C12.1@4225,-3273.43 4365,-3133.43 4365,-3066.1 GR2.1@4450,-2981.1 4450,-2725 ; LevelTr1.1@4393.84,-2664.06 ccw(c4401.56,-2665.47) LevelTr1.1@4396.01,-2671.01 ; LevelTr1.1@4403.68,-2665.85 ccw(c4424.4,-2669.62) 4409.51,-2684.51 ; LevelTr1.1@4413.52,-2667.64 ccw(c4447.24,-2673.77) 4423.01,-2698.01 ; LevelTr1.1@4423.36,-2669.43 ccw(c4470.08,-2677.92) 4436.5,-2711.5 ; GR2.1@4425.47,-2981.1 cw(c4366.26,-2981.1) 4408.13,-3022.97 cw(c4450,-3064.84) GR2.1@4450,-3005.63 ; LevelTr1.1@4426.5,-2663.19 ccw(c4426.5,-2638.29) 4444.1,-2655.9 ; GR2.1@4432.66,-2963.76 ccw(c4390.79,-2921.89) 4450,-2921.89 ccw(c4509.21,-2921.89) GR2.1@4467.34,-2963.76 ; LevelTr1.1@4433.2,-2671.22 ccw(c4492.92,-2682.07) 4450,-2725 ; GR2.1@4435.47,-2981.1 cw(c4400.4,-2981.1) 4425.2,-3005.9 cw(c4450,-3030.7) GR2.1@4450,-2995.63 ; GR2.1@4439.73,-2970.83 ccw(c4414.93,-2946.03) 4450,-2946.03 ccw(c4485.07,-2946.03) GR2.1@4460.27,-2970.83 ; 4206.02,-2353.56 ccw(c4222.47,-2353.56) 4210.84,-2365.18 cw(c4222.47,-2353.56) 4206.02,-2353.56 ; 4206.02,-2353.56 cw(c4189.58,-2353.56) 4201.21,-2365.18 ccw(c4189.58,-2353.56) 4206.02,-2353.56
5V: C13.1 DC2.14 P3.1 | length 1719.9
  Top Layer w15: P3.1@600,-4050 1200,-3450 DC2.14@1200,-3225 1100,-3125 C13.1@1100,-2975 ; P3.1@600,-4027.97 ccw(c600,-3974.79) 637.6,-4012.4 ccw(c675.21,-4050) P3.1@622.03,-4050 ; C13.1@1086.51,-2988.49 cw(c1053.95,-3021.05) 1100,-3021.05 cw(c1146.05,-3021.05) C13.1@1113.49,-2988.49 ; 1127.45,-3152.45 ccw(c1200,-3079.9) DC2.14@1200,-3182.5 ; 1153.05,-3178.05 ccw(c1200,-3131.11) DC2.14@1200,-3197.5 ; DC2.14@1187.63,-3262.37 cw(c1157.75,-3292.25) 1200,-3292.25 cw(c1242.25,-3292.25) DC2.14@1212.37,-3262.37
-5V: C15.2 DC2.11 P4.1 | length 1579.2
  Top Layer w15: P4.1@1109.42,-4034.42 ccw(c1071.82,-3996.82) 1125,-3996.82 ccw(c1178.18,-3996.82) P4.1@1140.58,-4034.42 ; P4.1@1125,-4050 1125,-3900 DC2.11@1200,-3825 1325,-3700 C15.2@1325,-2975 ; 1127.45,-3897.55 cw(c1200,-3970.1) DC2.11@1200,-3867.5 ; 1153.05,-3871.95 cw(c1200,-3918.89) DC2.11@1200,-3852.5 ; DC2.11@1200,-3797.5 ccw(c1200,-3731.11) 1246.95,-3778.05 ; DC2.11@1200,-3782.5 ccw(c1200,-3679.9) 1272.55,-3752.45 ; C15.2@1311.51,-2988.49 cw(c1278.95,-3021.05) 1325,-3021.05 cw(c1371.05,-3021.05) C15.2@1338.49,-2988.49
A0: FPGA_Board1.44 MUX1.17 MUX2.17 MUX3.17 MUX4.17 MUX5.17 MUX7.17 P2.5 | length 11874.1
  Top Layer w8: P2.5@3510,-4245.53 cw(c3510,-4307.16) 3553.58,-4263.58 cw(c3597.16,-4220) P2.5@3535.53,-4220 ; P2.5@3510,-4237.53 cw(c3510,-4279.84) 3539.92,-4249.92 cw(c3569.84,-4220) P2.5@3527.53,-4220 ; P2.5@3510,-4220 3590,-4300 4480.78,-4300 4482.49,-4301.72 4648.28,-4301.72 5067.77,-3882.23 5292.01,-3882.23 5359.09,-3815.16 MUX7.17@5488.19,-3815.16 5570.16,-3815.16 5670,-3915 6160,-3915 6259.84,-3815.16 MUX5.17@6338.19,-3815.16 6430.16,-3815.16 6525,-3910 v1(6720,-3910) 7025,-3910 7119.84,-3815.16 MUX4.17@7188.19,-3815.16 ; MUX1.17@5261.81,-484.84 5315.16,-484.84 5415,-385 5935,-385 6034.84,-484.84 MUX2.17@6086.81,-484.84 6165.16,-484.84 6250,-400 6765,-400 6849.84,-484.84 MUX3.17@6911.81,-484.84 7040.91,-484.84 7139.76,-386 7236,-386 7513,-663 7513,-3792 7315,-3990 v1(6915,-3990) ; v1@6712.22,-3917.78 ccw(c6693.44,-3936.56) 6693.44,-3910 ccw(c6693.44,-3883.44) v1@6712.22,-3902.22 ; v1@6727.78,-3917.78 cw(c6746.56,-3936.56) 6746.56,-3910 cw(c6746.56,-3883.44) v1@6727.78,-3902.22 ; v1@6922.78,-3997.78 cw(c6941.56,-4016.56) 6941.56,-3990 cw(c6941.56,-3963.44) v1@6922.78,-3982.22 ; 5292.41,-484.84 ccw(c5292.41,-491.82) 5287.48,-486.89 cw(c5292.41,-491.82) 5292.41,-484.84 ; 5292.41,-484.84 cw(c5292.41,-477.87) 5287.48,-482.8 ccw(c5292.41,-477.87) 5292.41,-484.84 ; 5457.59,-3815.16 ccw(c5457.59,-3808.18) 5462.52,-3813.11 cw(c5457.59,-3808.18) 5457.59,-3815.16 ; 5457.59,-3815.16 cw(c5457.59,-3822.13) 5462.52,-3817.2 ccw(c5457.59,-3822.13) 5457.59,-3815.16 ; 5518.79,-3815.16 ccw(c5518.79,-3822.13) 5513.85,-3817.2 cw(c5518.79,-3822.13) 5518.79,-3815.16 ; 5518.79,-3815.16 cw(c5518.79,-3808.18) 5513.85,-3813.11 ccw(c5518.79,-3808.18) 5518.79,-3815.16 ; 6056.21,-484.84 ccw(c6056.21,-477.87) 6061.15,-482.8 cw(c6056.21,-477.87) 6056.21,-484.84 ; 6056.21,-484.84 cw(c6056.21,-491.82) 6061.15,-486.89 ccw(c6056.21,-491.82) 6056.21,-484.84 ; 6117.41,-484.84 ccw(c6117.41,-491.82) 6112.48,-486.89 cw(c6117.41,-491.82) 6117.41,-484.84 ; 6117.41,-484.84 cw(c6117.41,-477.87) 6112.48,-482.8 ccw(c6117.41,-477.87) 6117.41,-484.84 ; 6307.59,-3815.16 ccw(c6307.59,-3808.18) 6312.52,-3813.11 cw(c6307.59,-3808.18) 6307.59,-3815.16 ; 6307.59,-3815.16 cw(c6307.59,-3822.13) 6312.52,-3817.2 ccw(c6307.59,-3822.13) 6307.59,-3815.16 ; 6368.79,-3815.16 ccw(c6368.79,-3822.13) 6363.85,-3817.2 cw(c6368.79,-3822.13) 6368.79,-3815.16 ; 6368.79,-3815.16 cw(c6368.79,-3808.18) 6363.85,-3813.11 ccw(c6368.79,-3808.18) 6368.79,-3815.16 ; 6881.21,-484.84 ccw(c6881.21,-477.87) 6886.15,-482.8 cw(c6881.21,-477.87) 6881.21,-484.84 ; 6881.21,-484.84 cw(c6881.21,-491.82) 6886.15,-486.89 ccw(c6881.21,-491.82) 6881.21,-484.84 ; 6942.41,-484.84 ccw(c6942.41,-491.82) 6937.48,-486.89 cw(c6942.41,-491.82) 6942.41,-484.84 ; 6942.41,-484.84 cw(c6942.41,-477.87) 6937.48,-482.8 ccw(c6942.41,-477.87) 6942.41,-484.84 ; 7157.59,-3815.16 ccw(c7157.59,-3808.18) 7162.52,-3813.11 cw(c7157.59,-3808.18) 7157.59,-3815.16 ; 7157.59,-3815.16 cw(c7157.59,-3822.13) 7162.52,-3817.2 ccw(c7157.59,-3822.13) 7157.59,-3815.16
  Top Layer w10: P2.5@3492.66,-4202.66 ccw(c3450.79,-4160.79) 3510,-4160.79 ccw(c3569.21,-4160.79) P2.5@3527.34,-4202.66 ; FPGA_Board1.44@3492.66,-3922.34 cw(c3450.79,-3964.21) 3510,-3964.21 cw(c3569.21,-3964.21) FPGA_Board1.44@3527.34,-3922.34 ; P2.5@3499.73,-4209.73 ccw(c3474.93,-4184.93) 3510,-4184.93 ccw(c3545.07,-4184.93) P2.5@3520.27,-4209.73 ; FPGA_Board1.44@3499.73,-3915.27 cw(c3474.93,-3940.07) 3510,-3940.07 cw(c3545.07,-3940.07) FPGA_Board1.44@3520.27,-3915.27 ; P2.5@3510,-4220 FPGA_Board1.44@3510,-3905
  Bottom Layer w8: v1@6720,-3921 cw(c6720,-3947.56) 6738.78,-3928.78 cw(c6757.56,-3910) v1@6731,-3910 ; v1(6720,-3910) 6800,-3990 v1(6915,-3990) ; v1@6907.22,-3997.78 ccw(c6888.44,-4016.56) 6888.44,-3990 ccw(c6888.44,-3963.44) v1@6907.22,-3982.22
A1: FPGA_Board1.43 MUX1.16 MUX2.16 MUX3.16 MUX4.16 MUX5.16 MUX7.16 P2.6 | length 12053.8
  Top Layer w8: P2.6@3410,-4220 3455.51,-4220 ; P2.6@3424.96,-4229.14 cw(c3441.25,-4239.09) 3441.25,-4220 cw(c3441.25,-4200.91) P2.6@3424.96,-4210.86 ; P2.6@3431.78,-4233.31 cw(c3455.51,-4247.81) 3455.51,-4220 ; P2.6@3431.78,-4206.69 ccw(c3455.51,-4192.19) 3455.51,-4220 ; MUX1.16@5261.81,-459.25 5300.75,-459.25 5395,-365 5950,-365 6044.25,-459.25 MUX2.16@6086.81,-459.25 6145.75,-459.25 6235,-370 6770,-370 6859.25,-459.25 MUX3.16@6911.81,-459.25 7036.93,-459.25 7123.19,-373 7241.38,-373 7526,-657.62 7526,-3797.38 7309.38,-4014 6789,-4014 v1(6780,-4005) ; v1@6677.22,-3947.78 ccw(c6658.44,-3966.56) 6658.44,-3940 ccw(c6658.44,-3913.44) v1@6677.22,-3932.22 ; v1@6782.12,-4002.88 ccw(c6808.97,-3976.03) 6808.97,-4014 ; v1@6787.78,-3997.22 ccw(c6828.28,-3956.72) 6828.28,-4014 ; MUX4.16@7188.19,-3840.75 7134.25,-3840.75 7035,-3940 v1(6685,-3940) 6500,-3940 6400.75,-3840.75 MUX5.16@6338.19,-3840.75 6294.25,-3840.75 6195,-3940 5645,-3940 5545.75,-3840.75 MUX7.16@5488.19,-3840.75 5364.25,-3840.75 5305,-3900 5068.38,-3900 4653.67,-4314.72 3550.23,-4314.72 3455.51,-4220 ; 5292.41,-459.25 ccw(c5292.41,-466.23) 5287.48,-461.3 cw(c5292.41,-466.23) 5292.41,-459.25 ; 5292.41,-459.25 cw(c5292.41,-452.28) 5287.48,-457.21 ccw(c5292.41,-452.28) 5292.41,-459.25 ; 5457.59,-3840.75 ccw(c5457.59,-3833.77) 5462.52,-3838.7 cw(c5457.59,-3833.77) 5457.59,-3840.75 ; 5457.59,-3840.75 cw(c5457.59,-3847.72) 5462.52,-3842.79 ccw(c5457.59,-3847.72) 5457.59,-3840.75 ; 5518.79,-3840.75 ccw(c5518.79,-3847.72) 5513.85,-3842.79 cw(c5518.79,-3847.72) 5518.79,-3840.75 ; 5518.79,-3840.75 cw(c5518.79,-3833.77) 5513.85,-3838.7 ccw(c5518.79,-3833.77) 5518.79,-3840.75 ; 6056.21,-459.25 ccw(c6056.21,-452.28) 6061.15,-457.21 cw(c6056.21,-452.28) 6056.21,-459.25 ; 6056.21,-459.25 cw(c6056.21,-466.23) 6061.15,-461.3 ccw(c6056.21,-466.23) 6056.21,-459.25 ; 6117.41,-459.25 ccw(c6117.41,-466.23) 6112.48,-461.3 cw(c6117.41,-466.23) 6117.41,-459.25 ; 6117.41,-459.25 cw(c6117.41,-452.28) 6112.48,-457.21 ccw(c6117.41,-452.28) 6117.41,-459.25 ; 6307.59,-3840.75 ccw(c6307.59,-3833.77) 6312.52,-3838.7 cw(c6307.59,-3833.77) 6307.59,-3840.75 ; 6307.59,-3840.75 cw(c6307.59,-3847.72) 6312.52,-3842.79 ccw(c6307.59,-3847.72) 6307.59,-3840.75 ; 6368.79,-3840.75 ccw(c6368.79,-3847.72) 6363.85,-3842.79 cw(c6368.79,-3847.72) 6368.79,-3840.75 ; 6368.79,-3840.75 cw(c6368.79,-3833.77) 6363.85,-3838.7 ccw(c6368.79,-3833.77) 6368.79,-3840.75 ; 6711.56,-3940 ccw(c6711.56,-3966.56) 6692.78,-3947.78 cw(c6711.56,-3966.56) 6711.56,-3940 ; 6711.56,-3940 cw(c6711.56,-3913.44) 6692.78,-3932.22 ccw(c6711.56,-3913.44) 6711.56,-3940 ; 6881.21,-459.25 ccw(c6881.21,-452.28) 6886.15,-457.21 cw(c6881.21,-452.28) 6881.21,-459.25 ; 6881.21,-459.25 cw(c6881.21,-466.23) 6886.15,-461.3 ccw(c6881.21,-466.23) 6881.21,-459.25 ; 6942.41,-459.25 ccw(c6942.41,-466.23) 6937.48,-461.3 cw(c6942.41,-466.23) 6942.41,-459.25 ; 6942.41,-459.25 cw(c6942.41,-452.28) 6937.48,-457.21 ccw(c6942.41,-452.28) 6942.41,-459.25 ; 7157.59,-3840.75 ccw(c7157.59,-3833.77) 7162.52,-3838.7 cw(c7157.59,-3833.77) 7157.59,-3840.75 ; 7157.59,-3840.75 cw(c7157.59,-3847.72) 7162.52,-3842.79 ccw(c7157.59,-3847.72) 7157.59,-3840.75
  Top Layer w10: P2.6@3392.66,-4202.66 ccw(c3350.79,-4160.79) 3410,-4160.79 ccw(c3469.21,-4160.79) P2.6@3427.34,-4202.66 ; FPGA_Board1.43@3392.66,-3922.34 cw(c3350.79,-3964.21) 3410,-3964.21 cw(c3469.21,-3964.21) FPGA_Board1.43@3427.34,-3922.34 ; P2.6@3399.73,-4209.73 ccw(c3374.93,-4184.93) 3410,-4184.93 ccw(c3445.07,-4184.93) P2.6@3420.27,-4209.73 ; FPGA_Board1.43@3399.73,-3915.27 cw(c3374.93,-3940.07) 3410,-3940.07 cw(c3445.07,-3940.07) FPGA_Board1.43@3420.27,-3915.27 ; P2.6@3410,-4220 FPGA_Board1.43@3410,-3910
  Bottom Layer w8: v1@6685,-3951 cw(c6685,-3977.56) 6703.78,-3958.78 cw(c6722.56,-3940) v1@6696,-3940 ; v1(6685,-3940) 6750,-4005 v1(6780,-4005) ; v1@6772.22,-4012.78 ccw(c6753.44,-4031.56) 6753.44,-4005 ccw(c6753.44,-3978.44) v1@6772.22,-3997.22
A2: FPGA_Board1.42 MUX1.15 MUX2.15 MUX3.15 MUX4.15 MUX5.15 MUX7.15 P2.7 | length 12036.4
  Top Layer w8: P2.7@3310,-4220 3355.51,-4220 ; P2.7@3324.96,-4229.14 cw(c3341.25,-4239.09) 3341.25,-4220 cw(c3341.25,-4200.91) P2.7@3324.96,-4210.86 ; P2.7@3331.78,-4233.31 cw(c3355.51,-4247.81) 3355.51,-4220 ; P2.7@3331.78,-4206.69 ccw(c3355.51,-4192.19) 3355.51,-4220 ; MUX1.15@5261.81,-433.66 5286.34,-433.66 5379.53,-340.47 5950.47,-340.47 6043.66,-433.66 MUX2.15@6086.81,-433.66 6131.34,-433.66 6229.53,-335.47 6770,-335.47 6868.19,-433.66 MUX3.15@6911.81,-433.66 7044.14,-433.66 7117.8,-360 7246.77,-360 7539,-652.23 7539,-3802.77 7286.77,-4055 6726.83,-4055 6645,-3973.17 ; MUX7.15@5511.81,-3869.23 cw(c5511.81,-3899.21) 5533.01,-3878.01 ; MUX7.15@5511.81,-3861.23 cw(c5511.81,-3871.89) 5519.35,-3864.35 ; 7146.43,-3876.74 cw(c7164.57,-3894.88) MUX4.15@7164.57,-3869.23 ; MUX4.15@7188.19,-3866.34 7156.83,-3866.34 7063.17,-3960 6895,-3960 6886.83,-3968.17 6645,-3968.17 6645,-3973.17 ; 3355.51,-4220 3463.23,-4327.72 4659.05,-4327.72 5061.77,-3925 5320,-3925 5378.66,-3866.34 MUX7.15@5488.19,-3866.34 5521.34,-3866.34 5630,-3975 6195,-3975 6303.66,-3866.34 MUX5.15@6338.19,-3866.34 6373.17,-3866.34 6475,-3968.17 6640,-3968.17 6645,-3973.17 ; 5457.59,-3866.34 ccw(c5457.59,-3859.36) 5462.52,-3864.3 cw(c5457.59,-3859.36) 5457.59,-3866.34 ; 5457.59,-3866.34 cw(c5457.59,-3873.32) 5462.52,-3868.38 ccw(c5457.59,-3873.32) 5457.59,-3866.34 ; 5518.79,-3866.34 ccw(c5518.79,-3873.32) 5513.85,-3868.38 cw(c5518.79,-3873.32) 5518.79,-3866.34 ; 5518.79,-3866.34 cw(c5518.79,-3859.36) 5513.85,-3864.3 ccw(c5518.79,-3859.36) 5518.79,-3866.34 ; 6056.21,-433.66 ccw(c6056.21,-426.68) 6061.15,-431.62 cw(c6056.21,-426.68) 6056.21,-433.66 ; 6056.21,-433.66 cw(c6056.21,-440.64) 6061.15,-435.7 ccw(c6056.21,-440.64) 6056.21,-433.66 ; 6117.41,-433.66 ccw(c6117.41,-440.64) 6112.48,-435.7 cw(c6117.41,-440.64) 6117.41,-433.66 ; 6117.41,-433.66 cw(c6117.41,-426.68) 6112.48,-431.62 ccw(c6117.41,-426.68) 6117.41,-433.66 ; 6307.59,-3866.34 ccw(c6307.59,-3859.36) 6312.52,-3864.3 cw(c6307.59,-3859.36) 6307.59,-3866.34 ; 6307.59,-3866.34 cw(c6307.59,-3873.32) 6312.52,-3868.38 ccw(c6307.59,-3873.32) 6307.59,-3866.34 ; 6368.79,-3866.34 ccw(c6368.79,-3873.32) 6363.85,-3868.38 cw(c6368.79,-3873.32) 6368.79,-3866.34 ; 6368.79,-3866.34 cw(c6368.79,-3859.36) 6363.85,-3864.3 ccw(c6368.79,-3859.36) 6368.79,-3866.34 ; 6881.21,-433.66 ccw(c6881.21,-426.68) 6886.15,-431.62 cw(c6881.21,-426.68) 6881.21,-433.66 ; 6881.21,-433.66 cw(c6881.21,-440.64) 6886.15,-435.7 ccw(c6881.21,-440.64) 6881.21,-433.66 ; 6942.41,-433.66 ccw(c6942.41,-440.64) 6937.48,-435.7 cw(c6942.41,-440.64) 6942.41,-433.66 ; 6942.41,-433.66 cw(c6942.41,-426.68) 6937.48,-431.62 ccw(c6942.41,-426.68) 6942.41,-433.66 ; 7157.59,-3866.34 ccw(c7157.59,-3859.36) 7162.52,-3864.3 cw(c7157.59,-3859.36) 7157.59,-3866.34 ; 7157.59,-3866.34 cw(c7157.59,-3873.32) 7162.52,-3868.38 ccw(c7157.59,-3873.32) 7157.59,-3866.34 ; MUX1.15@5285.43,-430.77 ccw(c5285.43,-421.61) 5291.91,-428.09 cw(c5285.43,-421.61) MUX1.15@5285.43,-430.77
  Top Layer w10: P2.7@3292.66,-4202.66 ccw(c3250.79,-4160.79) 3310,-4160.79 ccw(c3369.21,-4160.79) P2.7@3327.34,-4202.66 ; FPGA_Board1.42@3292.66,-3922.34 cw(c3250.79,-3964.21) 3310,-3964.21 cw(c3369.21,-3964.21) FPGA_Board1.42@3327.34,-3922.34 ; P2.7@3299.73,-4209.73 ccw(c3274.93,-4184.93) 3310,-4184.93 ccw(c3345.07,-4184.93) P2.7@3320.27,-4209.73 ; FPGA_Board1.42@3299.73,-3915.27 cw(c3274.93,-3940.07) 3310,-3940.07 cw(c3345.07,-3940.07) FPGA_Board1.42@3320.27,-3915.27 ; P2.7@3310,-4220 FPGA_Board1.42@3310,-3905
A3: FPGA_Board1.41 MUX1.14 MUX2.14 MUX3.14 MUX4.14 MUX5.14 MUX7.14 P2.8 | length 11969.5
  Top Layer w8: FPGA_Board1.41@3210,-3905 3495,-3620 4805,-3620 4980,-3795 5115,-3795 v1(5160,-3840) 5186.34,-3866.34 MUX7.14@5261.81,-3866.34 ; FPGA_Board1.41@3210,-3887.47 ccw(c3210,-3845.16) 3239.92,-3875.08 ccw(c3269.84,-3905) FPGA_Board1.41@3227.53,-3905 ; FPGA_Board1.41@3210,-3879.47 ccw(c3210,-3817.84) 3253.58,-3861.42 ccw(c3297.16,-3905) FPGA_Board1.41@3235.53,-3905 ; v1@5149,-3840 ccw(c5122.44,-3840) 5141.22,-3821.22 ccw(c5160,-3802.44) v1@5160,-3829 ; v1@5160,-3851 cw(c5160,-3877.56) 5178.78,-3858.78 cw(c5197.56,-3840) v1@5171,-3840 ; MUX1.14@5488.19,-433.66 5536.34,-433.66 ; v1@5544,-415.05 cw(c5517.85,-415.17) 5536.34,-433.66 ; v1@5554.95,-426 ccw(c5554.83,-452.15) 5536.34,-433.66 ; v1(5555,-415) 5536.34,-433.66 ; v1@5995,-3856 cw(c5995,-3882.56) 6013.78,-3863.78 cw(c6032.56,-3845) v1@6006,-3845 ; v1(5995,-3845) 6016.34,-3866.34 MUX5.14@6111.81,-3866.34 ; MUX2.14@6313.19,-433.66 6396.34,-433.66 v1(6400,-430) ; 6364.6,-433.66 ccw(c6364.6,-394.6) v1@6392.22,-422.22 ; 6382.28,-433.66 cw(c6382.28,-447.72) v1@6392.22,-437.78 ; 6383.92,-433.66 ccw(c6383.92,-413.92) v1@6397.88,-427.88 ; v1(6805,-3875) 6871.34,-3875 6880,-3866.34 MUX4.14@6961.81,-3866.34 ; v1@6812.78,-3882.78 cw(c6831.56,-3901.56) 6831.56,-3875 cw(c6831.56,-3848.44) v1@6812.78,-3867.22 ; MUX3.14@7138.19,-433.66 7206.34,-433.66 7215,-425 ; v1@7231.89,-432.43 ccw(c7215,-447.91) 7215,-425 ; v1@7231.89,-417.57 cw(c7215,-402.09) 7215,-425 ; v1(7240,-425) 7215,-425 ; 5231.21,-3866.34 ccw(c5231.21,-3859.36) 5236.15,-3864.3 cw(c5231.21,-3859.36) 5231.21,-3866.34 ; 5231.21,-3866.34 cw(c5231.21,-3873.32) 5236.15,-3868.38 ccw(c5231.21,-3873.32) 5231.21,-3866.34 ; 5518.79,-433.66 ccw(c5518.79,-440.64) 5513.85,-435.7 cw(c5518.79,-440.64) 5518.79,-433.66 ; 5518.79,-433.66 cw(c5518.79,-426.68) 5513.85,-431.62 ccw(c5518.79,-426.68) 5518.79,-433.66 ; 6081.21,-3866.34 ccw(c6081.21,-3859.36) 6086.15,-3864.3 cw(c6081.21,-3859.36) 6081.21,-3866.34 ; 6081.21,-3866.34 cw(c6081.21,-3873.32) 6086.15,-3868.38 ccw(c6081.21,-3873.32) 6081.21,-3866.34 ; 6343.79,-433.66 ccw(c6343.79,-440.64) 6338.85,-435.7 cw(c6343.79,-440.64) 6343.79,-433.66 ; 6343.79,-433.66 cw(c6343.79,-426.68) 6338.85,-431.62 ccw(c6343.79,-426.68) 6343.79,-433.66 ; 6931.21,-3866.34 ccw(c6931.21,-3859.36) 6936.15,-3864.3 cw(c6931.21,-3859.36) 6931.21,-3866.34 ; 6931.21,-3866.34 cw(c6931.21,-3873.32) 6936.15,-3868.38 ccw(c6931.21,-3873.32) 6931.21,-3866.34 ; 7168.79,-433.66 ccw(c7168.79,-440.64) 7163.85,-435.7 cw(c7168.79,-440.64) 7168.79,-433.66 ; 7168.79,-433.66 cw(c7168.79,-426.68) 7163.85,-431.62 ccw(c7168.79,-426.68) 7168.79,-433.66
  Top Layer w10: P2.8@3192.66,-4202.66 ccw(c3150.79,-4160.79) 3210,-4160.79 ccw(c3269.21,-4160.79) P2.8@3227.34,-4202.66 ; FPGA_Board1.41@3192.66,-3922.34 cw(c3150.79,-3964.21) 3210,-3964.21 cw(c3269.21,-3964.21) FPGA_Board1.41@3227.34,-3922.34 ; P2.8@3199.73,-4209.73 ccw(c3174.93,-4184.93) 3210,-4184.93 ccw(c3245.07,-4184.93) P2.8@3220.27,-4209.73 ; FPGA_Board1.41@3199.73,-3915.27 cw(c3174.93,-3940.07) 3210,-3940.07 cw(c3245.07,-3940.07) FPGA_Board1.41@3220.27,-3915.27 ; P2.8@3210,-4220 FPGA_Board1.41@3210,-3905
  Bottom Layer w8: v1(5160,-3840) 5185,-3815 5965,-3815 v1(5995,-3845) 6015,-3825 6660,-3825 6710,-3875 v1(6805,-3875) 7250,-3875 7530,-3595 7530,-715 v1(7240,-425) 7195,-380 6450,-380 v1(6400,-430) 6385,-415 v1(5555,-415) ; v1@5160,-3829 ccw(c5160,-3802.44) 5178.78,-3821.22 ccw(c5197.56,-3840) v1@5171,-3840 ; v1@5562.78,-422.78 cw(c5581.56,-441.56) 5581.56,-415 cw(c5581.56,-388.44) v1@5562.78,-407.22 ; v1@5984,-3845 ccw(c5957.44,-3845) 5976.22,-3826.22 ccw(c5995,-3807.44) 5995,-3834 ccw(c5995,-3807.44) 6013.78,-3826.22 ccw(c6032.56,-3845) v1@6006,-3845 ; v1@6400,-419 ccw(c6400,-392.44) 6418.78,-411.22 ccw(c6437.56,-430) v1@6411,-430 ; v1@6797.22,-3882.78 ccw(c6778.44,-3901.56) 6778.44,-3875 ccw(c6778.44,-3848.44) v1@6797.22,-3867.22 ; v1@6812.78,-3882.78 cw(c6831.56,-3901.56) 6831.56,-3875 cw(c6831.56,-3848.44) v1@6812.78,-3867.22 ; v1@7229,-425 ccw(c7202.44,-425) 7221.22,-406.22 ccw(c7240,-387.44) v1@7240,-414 ; v1@7240,-436 cw(c7240,-462.56) 7258.78,-443.78 cw(c7277.56,-425) v1@7251,-425
CELL0: MUX1.19 P23.1 RR1.1 | length 3318.6
  Top Layer w5: RR1.1@6060.85,-2299.01 cw(c6071.32,-2301.15) 6068.55,-2290.84 ; RR1.1@6063.46,-2299.54 6107,-2256 v2(6106,-2255) ; RR1.1@6063.99,-2302.15 ccw(c6061.85,-2291.68) 6072.16,-2294.45 ; 6096.81,-2261.32 cw(c6108.84,-2264.54) v2@6105.29,-2252.6 ; 6075.99,-2287.01 ccw(c6088.53,-2299.54) 6070.8,-2299.54 cw(c6088.53,-2299.54) 6075.99,-2287.01 ; 6075.99,-2287.01 cw(c6063.46,-2274.47) 6063.46,-2292.2 ccw(c6063.46,-2274.47) 6075.99,-2287.01 ; 6091.78,-2271.22 ccw(c6075.57,-2255) 6098.5,-2255 cw(c6075.57,-2255) 6091.78,-2271.22 ; 6096.61,-2266.39 cw(c6106,-2275.78) 6106,-2262.5 ccw(c6106,-2275.78) 6096.61,-2266.39
  Top Layer w8: P23.1@4991.47,-1246 ccw(c4929.84,-1246) 4973.42,-1202.42 ccw(c5017,-1158.84) P23.1@5017,-1220.47 ; P23.1@4999.47,-1246 ccw(c4957.16,-1246) 4987.08,-1216.08 ccw(c5017,-1186.16) P23.1@5017,-1228.47 ; P23.1@5017,-1246 4845,-1074 4845,-610 4918.98,-536.02 MUX1.19@5261.81,-536.02 ; 5231.21,-536.02 ccw(c5231.21,-529.05) 5236.15,-533.98 cw(c5231.21,-529.05) 5231.21,-536.02 ; 5231.21,-536.02 cw(c5231.21,-543) 5236.15,-538.07 ccw(c5231.21,-543) 5231.21,-536.02
  Bottom Layer w5: 6037,-2256 6107,-2256 v2(6106,-2255)
  Bottom Layer w8: P23.1@4998.95,-1264.05 cw(c4955.37,-1307.63) 5017,-1307.63 cw(c5078.63,-1307.63) P23.1@5035.05,-1264.05 ; P23.1@5004.61,-1258.39 cw(c4974.68,-1288.32) 5017,-1288.32 cw(c5059.32,-1288.32) P23.1@5029.39,-1258.39 ; P23.1@5017,-1246 5017,-1406 5867,-2256 6037,-2256
CELL1: MUX1.20 P23.2 RR1.2 | length 3290.8
  Top Layer w5: RR1.2@6060.85,-2273.42 cw(c6071.32,-2275.56) 6068.55,-2265.24 ; RR1.2@6063.46,-2273.95 6088.5,-2248.91 6088.5,-2247.75 6103.25,-2233 v2(6125,-2233) ; RR1.2@6063.99,-2276.56 ccw(c6061.85,-2266.09) 6072.16,-2268.86 ; 6075.99,-2261.42 ccw(c6088.53,-2273.95) 6070.8,-2273.95 cw(c6088.53,-2273.95) 6075.99,-2261.42 ; 6075.99,-2261.42 cw(c6063.46,-2248.88) 6063.46,-2266.61 ccw(c6063.46,-2248.88) 6075.99,-2261.42 ; 6106.89,-2233 ccw(c6106.89,-2214.89) 6119.7,-2227.7 cw(c6106.89,-2214.89) 6106.89,-2233 ; 6106.89,-2233 cw(c6106.89,-2251.11) 6119.7,-2238.3 ccw(c6106.89,-2251.11) 6106.89,-2233
  Top Layer w8: P23.2@4991.47,-1146 ccw(c4929.84,-1146) 4973.42,-1102.42 ccw(c5017,-1058.84) P23.2@5017,-1120.47 ; P23.2@4999.47,-1146 ccw(c4957.16,-1146) 4987.08,-1116.08 ccw(c5017,-1086.16) P23.2@5017,-1128.47 ; P23.2@5017,-1146 4880,-1009 4880,-630 4948.39,-561.61 MUX1.20@5261.81,-561.61 ; 5231.21,-561.61 ccw(c5231.21,-554.64) 5236.15,-559.57 cw(c5231.21,-554.64) 5231.21,-561.61 ; 5231.21,-561.61 cw(c5231.21,-568.59) 5236.15,-563.66 ccw(c5231.21,-568.59) 5231.21,-561.61
  Bottom Layer w5: 6033.69,-2224.31 6054.39,-2245 6091.25,-2245 6103.25,-2233 v2(6125,-2233) ; 6106.89,-2233 ccw(c6106.89,-2214.89) 6119.7,-2227.7 cw(c6106.89,-2214.89) 6106.89,-2233 ; 6106.89,-2233 cw(c6106.89,-2251.11) 6119.7,-2238.3 ccw(c6106.89,-2251.11) 6106.89,-2233
  Bottom Layer w8: P23.2@5017,-1171.53 cw(c5017,-1233.16) 5060.58,-1189.58 cw(c5104.16,-1146) P23.2@5042.53,-1146 ; P23.2@5017,-1163.53 cw(c5017,-1205.84) 5046.92,-1175.92 cw(c5076.84,-1146) P23.2@5034.53,-1146 ; P23.2@5017,-1146 5078.47,-1207.47 5078.47,-1261.96 5812,-1995.49 5812,-2144.07 5892.24,-2224.31 6033.69,-2224.31